# Altium PCB PCB1.PcbDoc
Units mm, origin at the board's own origin, x right, y up, seen from the top; angles counter-clockwise.
Board outline 17.4 x 13.46 mm, 2 copper layers (Top Layer, Bottom Layer); 2 components, 8 nets, 16 pads, 8 vias.
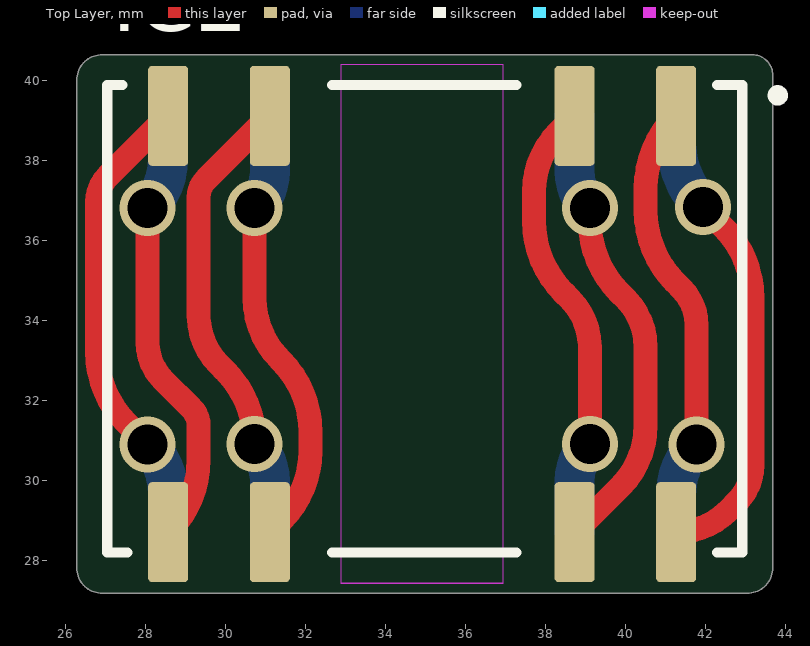
[diagram p0: Top Layer view]
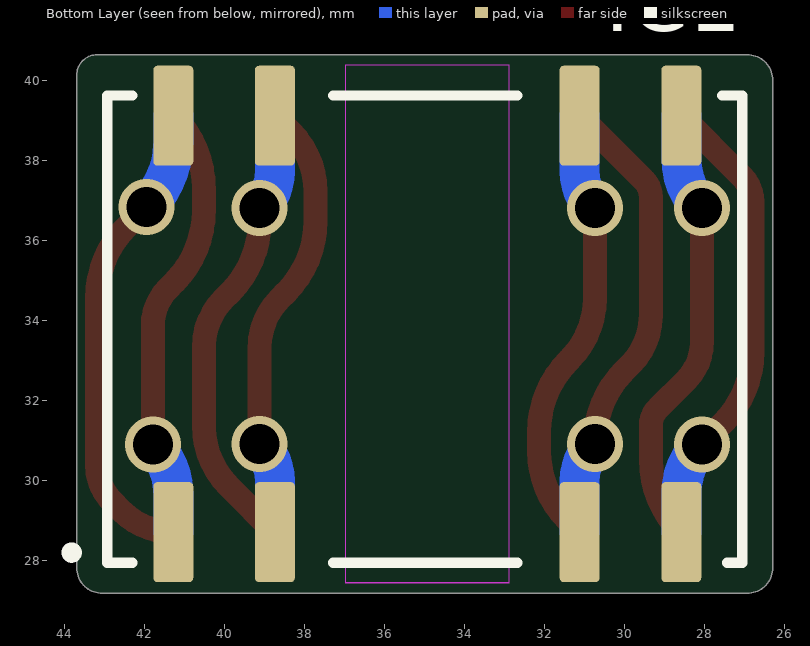
[diagram p1: Bottom Layer view, seen from below]

## Layer stack, top to bottom
Top Solder: solder mask 0.0102, Solder Resist, Dk 3.5
Top Layer: signal copper 0.0356
Dielectric 1: dielectric 0.32, FR-4, Dk 4.8
Bottom Layer: signal copper 0.0356
Bottom Solder: solder mask 0.0102, Solder Resist, Dk 3.5

## Board outline
26.924,27.178 cw(c26.924,27.813) 26.289,27.813 26.289,40.005 cw(c26.924,40.005) 26.924,40.64 43.18,40.64 cw(c43.18,40.132) 43.688,40.132 43.688,27.813 cw(c43.053,27.813) 43.053,27.178

## Design rules (kind name [scope] priority, off if disabled: settings)
Clearance [All] p1: gap=0.254 ignorepadtopadclearanceinfootprint=FALSE except(0: Arc-Hole Track-Hole SMDPad-Hole THPad-Hole Via-Hole Fill-Hole Poly-Hole Region-Hole Text-Hole)
PolygonConnect [All] p1: connectstyle=Relief reliefconductorwidth=0.254 reliefentries=4 polygonreliefangle="90 Angle" airgapwidth=0.254
RoomDefinition Sheet1 [InComponentClass('Sheet1')] p1: confinementstyle=ConfineIn formatcopy=TRUE lockcomponents=FALSE outline 54.229,27.305 82.169,27.305 82.169,47.244 54.229,47.244
RoutingVias [All] p1: holewidth=1 width=1.3 viastyle="Through Hole" minholewidth=0.711 minwidth=1.27 maxholewidth=2 maxwidth=3
SolderMaskExpansion [All] p1: expansion=0.102 istentingtop=FALSE
Width [All] p1: maxlimit=1 minlimit=0.254 preferedwidth=0.6
30 further rules are at their usual default settings.

## Components (designator, comment, footprint, x,y, rotation, side; value= is the part's Value field where it differs from the comment)
IC1 "NXJ2S0505MC-R7" DCDC 41.275,39.116 r180 bottom value="2 W"
IC2 "NXJ2S0505MC-R7" DCDC 41.275,28.704 r180 top value="2 W"

## Footprints (in the part's own frame and the unit in brackets; to place one, negate y for a bottom-side part, rotate by r counter-clockwise, add the part's x,y. Pads: shape width x height; smd on the part's side, far side on the other; paste and mask are expansions set on the pad)
DCDC [mm]
  rrect20% 1x2.5 smd: 1(0,-10.41) 2(2.54,-10.41) 5(10.16,-10.41) 6(12.7,-10.41) 7(12.7,0) 8(10.16,0) 11(2.54,0) 12(0,0)
  Keep-Out Layer region: 4.318,1.27 8.382,1.27 8.382,-11.684 4.318,-11.684
  silkscreen extent -2.67,-11.18 14.22,0.51, body extent -1.65,-10.92 13.84,0.51, height 4.23

## Part data
IC1 IC2: "Isolated DC/DC Converters - SMD 4.5V TO 5.5V IN 5V OUT", Device Package=-, Manufacturer=Murata, Supplier Part Number 1=811-3818-1-ND, Component Type="DC-DC Converter", ComponentLink1Description=Datasheet, ComponentLink1URL=https://www.murata.com/products/productdata/8807031996446/kdc-nxj2.pdf, Created from=VStarost, Created On="21.12.2022 14:43:56", Last Updated="21.12.2022 14:43:56", Live Cycle Status=1, Manufacturer Part Number=NXJ2S0505MC-R7, Mounting Type=SMD, PartID=26, Series=NXJ2, Stock number="not stored", Supplier 1=Digi-Key, Type="isolated DC-DC Converter"

## Via types
v1: diameter 1.4, hole 1, Top Layer to Bottom Layer, 8 vias

## Nets (pads, with @x,y where several pads share a name; then routed paths per layer and width w, separated by ;. In a path a pad name is that pad's centre, name@x,y a point inside that pad or via, vN(x,y) a via of type N, cw(c..) or ccw(c..) an arc to the next point about the centre after c; other vN are vias at no path point)
NetIC1_1: IC1.1 IC2.1 | length 11.1
  Top Layer w0.6: IC2.1 41.257,39.096 ccw(c43.053,37.3) 40.513,37.3 40.513,36.739 ccw(c43.053,36.739) 41.257,34.943 41.402,34.798 cw(c40.472,33.868) 41.787,33.868 v1(41.787,30.902)
  Bottom Layer w1: IC1.1 41.275,29.665 cw(c43.024,29.665) v1(41.787,30.902)
NetIC1_2: IC1.2 IC2.2 | length 11.2
  Top Layer w0.6: IC2.2 38.346,38.725 ccw(c39.86,37.211) 37.719,37.211 37.719,36.485 ccw(c40.259,36.485) 38.463,34.689 38.608,34.544 cw(c37.382,33.318) 39.116,33.318 v1(39.116,30.908)
  Bottom Layer w1: IC1.2 38.735,29.988 cw(c40.036,29.988) v1(39.116,30.908)
NetIC1_5: IC1.5 IC2.5 | length 11.6
  Top Layer w0.6: v1(30.734,30.908) 30.734,30.952 ccw(c28.194,30.952) 29.99,32.748 29.845,32.893 cw(c31.071,34.119) 29.337,34.119 29.337,37.084 cw(c29.945,37.084) 29.515,37.514 IC2.5
  Bottom Layer w1: v1(30.734,30.908) cw(c29.814,29.988) 31.115,29.988 IC1.5
NetIC1_6: IC1.6 IC2.6 | length 11.7
  Top Layer w0.6: v1(28.063,30.902) 27.541,31.424 cw(c29.337,33.22) 26.797,33.22 26.797,36.957 cw(c27.712,36.957) 27.065,37.604 IC2.6
  Bottom Layer w1: v1(28.063,30.902) cw(c26.826,29.665) 28.575,29.665 IC1.6
NetIC1_7: IC1.7 IC2.7 | length 11.2
  Top Layer w0.6: v1(28.063,36.809) 28.063,33.442 ccw(c29.378,33.442) 28.448,32.512 29.157,31.803 cw(c28.724,31.369) 29.337,31.369 29.337,30.518 cw(c26.797,30.518) 28.593,28.722 IC2.7
  Bottom Layer w1: v1(28.063,36.809) ccw(c26.826,38.045) 28.575,38.045 IC1.7
NetIC1_8: IC1.8 IC2.8 | length 11.2
  Top Layer w0.6: v1(30.734,36.803) 30.734,34.553 ccw(c32.902,34.553) 31.369,33.02 31.387,33.002 cw(c29.591,31.206) 32.131,31.206 32.131,30.734 cw(c29.683,30.734) 31.414,29.003 IC2.8
  Bottom Layer w1: v1(30.734,36.803) ccw(c29.814,37.723) 31.115,37.723 IC1.8
NetIC1_11: IC1.11 IC2.11 | length 11.6
  Top Layer w0.6: IC2.11 38.737,28.704 39.878,29.845 ccw(c38.345,31.378) 40.513,31.378 40.513,33.318 ccw(c38.779,33.318) 40.005,34.544 39.86,34.689 cw(c41.656,36.485) 39.116,36.485 v1(39.116,36.803)
  Bottom Layer w1: IC1.11 38.735,37.723 ccw(c40.036,37.723) v1(39.116,36.803)
NetIC1_12: IC1.12 IC2.12 | length 12.1
  Top Layer w0.6: IC2.12 ccw(c41.275,30.548) 42.579,29.244 42.799,29.464 ccw(c41.879,30.384) 43.18,30.384 43.18,34.553 ccw(c40.64,34.553) 42.436,36.349 v1(41.946,36.838)
  Bottom Layer w1: IC1.12 41.275,38.459 ccw(c43.567,38.459) v1(41.946,36.838)

## Polygon pours and split planes (outlines as drawn)
no net on Bottom Solder "NONET_L-01_P-001" (solid): 28.067,39.134 ccw(c28.374,38.827) 27.94,38.827 27.94,38.096 cw(c27.073,38.096) 27.686,37.483 ccw(c28.299,36.87) 27.432,36.87 ccw(c28.098,36.87) 27.627,36.399 ccw(c28.076,36.848) 28.076,36.213 ccw(c28.076,36.804) 28.494,36.386 28.581,36.473 ccw(c27.064,37.991) 29.21,37.991 29.21,38.827 ccw(c28.776,38.827) 29.083,39.134
no net on Bottom Solder "NONET_L-01_P-001" (solid): 30.607,39.007 ccw(c30.914,38.7) 30.48,38.7 30.48,37.79 cw(c30.046,37.79) 30.353,37.483 ccw(c30.966,36.87) 30.099,36.87 ccw(c30.458,36.87) 30.204,36.616 30.427,36.393 ccw(c30.861,36.826) 30.861,36.213 ccw(c30.861,36.52) 31.078,36.303 ccw(c29.455,37.926) 31.75,37.926 31.75,38.394 ccw(c30.883,38.394) 31.496,39.007
no net on Bottom Solder "NONET_L-01_P-001" (solid): 38.227,38.753 ccw(c38.534,38.446) 38.1,38.446 38.1,37.387 ccw(c39.401,37.387) 38.481,36.467 ccw(c39.094,37.08) 39.094,36.213 ccw(c39.094,36.879) 39.565,36.408 ccw(c39.116,36.857) 39.751,36.857 39.751,36.87 ccw(c38.884,36.87) 39.497,37.483 cw(c39.804,37.79) 39.37,37.79 39.37,38.319 ccw(c38.936,38.319) 39.243,38.626
no net on Bottom Solder "NONET_L-01_P-001" (solid): 40.894,39.007 40.82,38.933 ccw(c41.253,38.499) 40.64,38.499 40.64,38 ccw(c42.808,38) 41.275,36.467 ccw(c41.888,37.08) 41.888,36.213 ccw(c41.888,36.879) 42.359,36.408 ccw(c41.91,36.857) 42.545,36.857 42.545,36.997 ccw(c41.678,36.997) 42.291,37.61 42.09,37.811 cw(c42.523,38.245) 41.91,38.245 41.91,38.573 ccw(c41.476,38.573) 41.783,38.88
no net on Bottom Solder "NONET_L-01_P-001" (solid): 40.894,28.956 40.82,29.03 cw(c41.253,29.464) 40.64,29.464 40.64,29.963 cw(c42.808,29.963) 41.275,31.496 cw(c41.582,31.189) 41.582,31.623 41.91,31.623 cw(c41.91,31.316) 42.127,31.533 42.418,31.242 cw(c42.111,30.935) 42.545,30.935 42.545,30.66 cw(c42.111,30.66) 42.418,30.353 42,29.935 ccw(c42.217,29.718) 41.91,29.718 41.91,29.263 cw(c41.476,29.263) 41.783,28.956
no net on Bottom Solder "NONET_L-01_P-001" (solid): 38.1,30.27 cw(c39.834,30.27) 38.608,31.496 cw(c38.915,31.189) 38.915,31.623 39.243,31.623 cw(c39.243,31.316) 39.46,31.533 39.878,31.115 39.878,30.66 cw(c39.444,30.66) 39.751,30.353 39.55,30.152 ccw(c39.983,29.718) 39.37,29.718 39.37,29.39 cw(c38.936,29.39) 39.243,29.083 38.354,29.083 cw(c38.354,29.39) 38.137,29.173 38.1,29.21
no net on Bottom Solder "NONET_L-01_P-001" (solid): 30.48,28.956 ccw(c30.607,28.956) 30.607,28.829 31.623,28.829 ccw(c31.623,28.956) 31.75,28.956 31.75,30.449 ccw(c30.449,30.449) 31.369,31.369 ccw(c30.756,30.756) 30.756,31.623 30.607,31.623 ccw(c30.607,31.01) 30.173,31.443 30.099,31.369 ccw(c30.406,31.062) 29.972,31.062 29.972,30.66 ccw(c30.406,30.66) 30.099,30.353 30.39,30.062 cw(c30.173,29.845) 30.48,29.845
no net on Bottom Solder "NONET_L-01_P-001" (solid): 27.94,28.956 27.94,29.306 ccw(c26.639,29.306) 27.559,30.226 cw(c28.172,30.839) 27.305,30.839 27.305,30.988 cw(c27.612,30.988) 27.395,31.205 27.686,31.496 cw(c27.993,31.189) 27.993,31.623 28.194,31.623 cw(c28.194,31.01) 28.628,31.443 28.829,31.242 cw(c27.909,30.322) 29.21,30.322 29.21,28.956 cw(c29.083,28.956) 29.083,28.829 28.067,28.829 cw(c28.067,28.956)

## Silkscreen, mask and mechanical layers (free items; w line width, h text height)
Mechanical 1:
  the board outline again, w0.5